# Altium PCB PCB1.PcbDoc
Units mm, origin at the board's own origin, x right, y up, seen from the top; angles counter-clockwise.
Board outline 26 x 26 mm, 2 copper layers (Top Layer, Bottom Layer); 10 components, 12 nets, 47 pads, 9 vias.
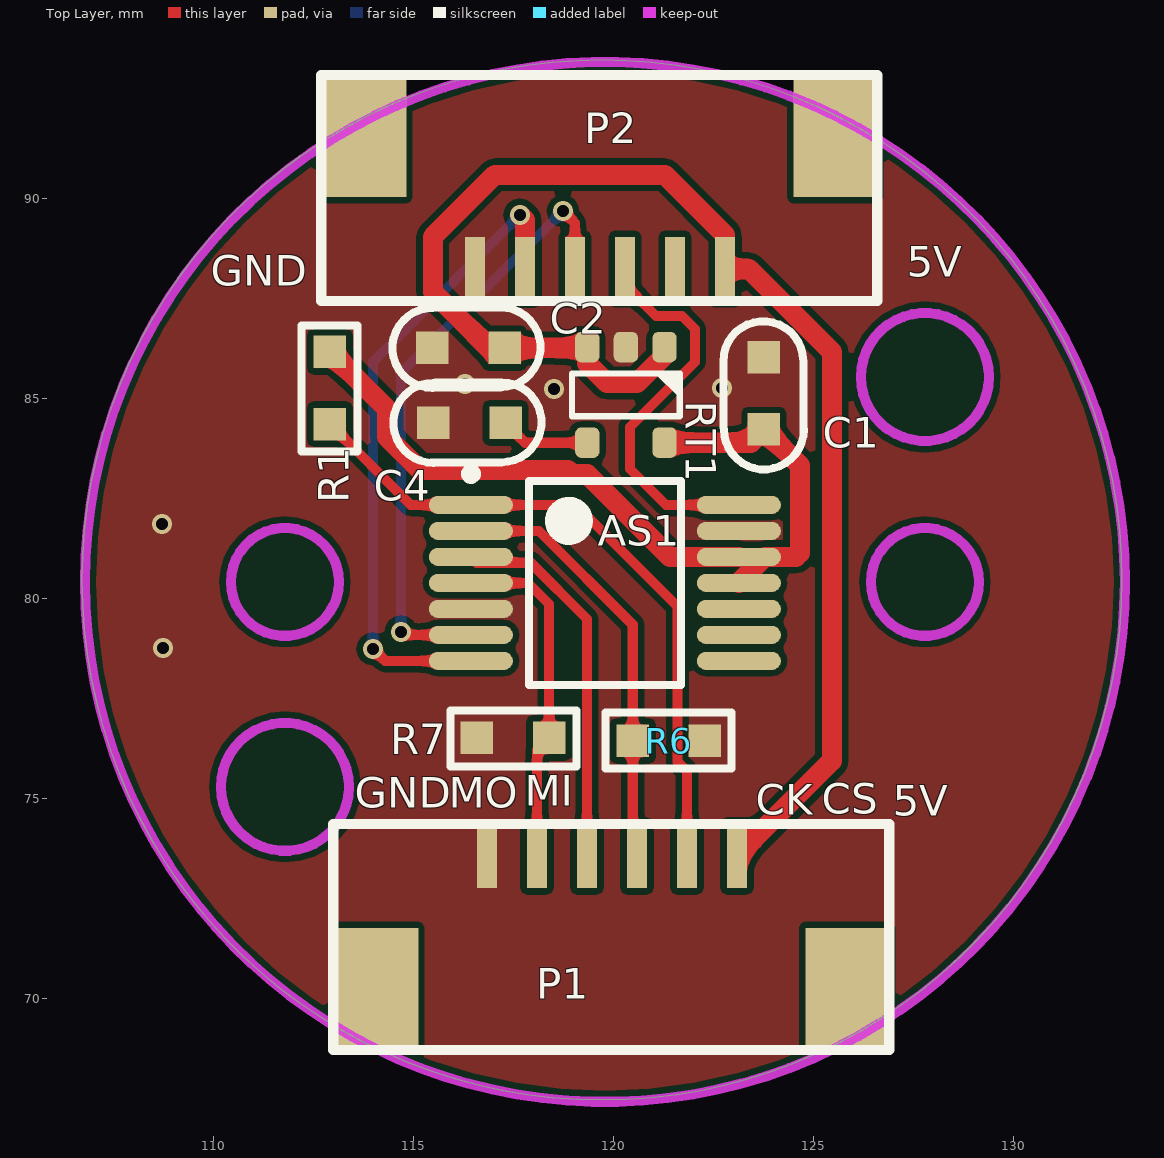
[diagram p0: Top Layer view]
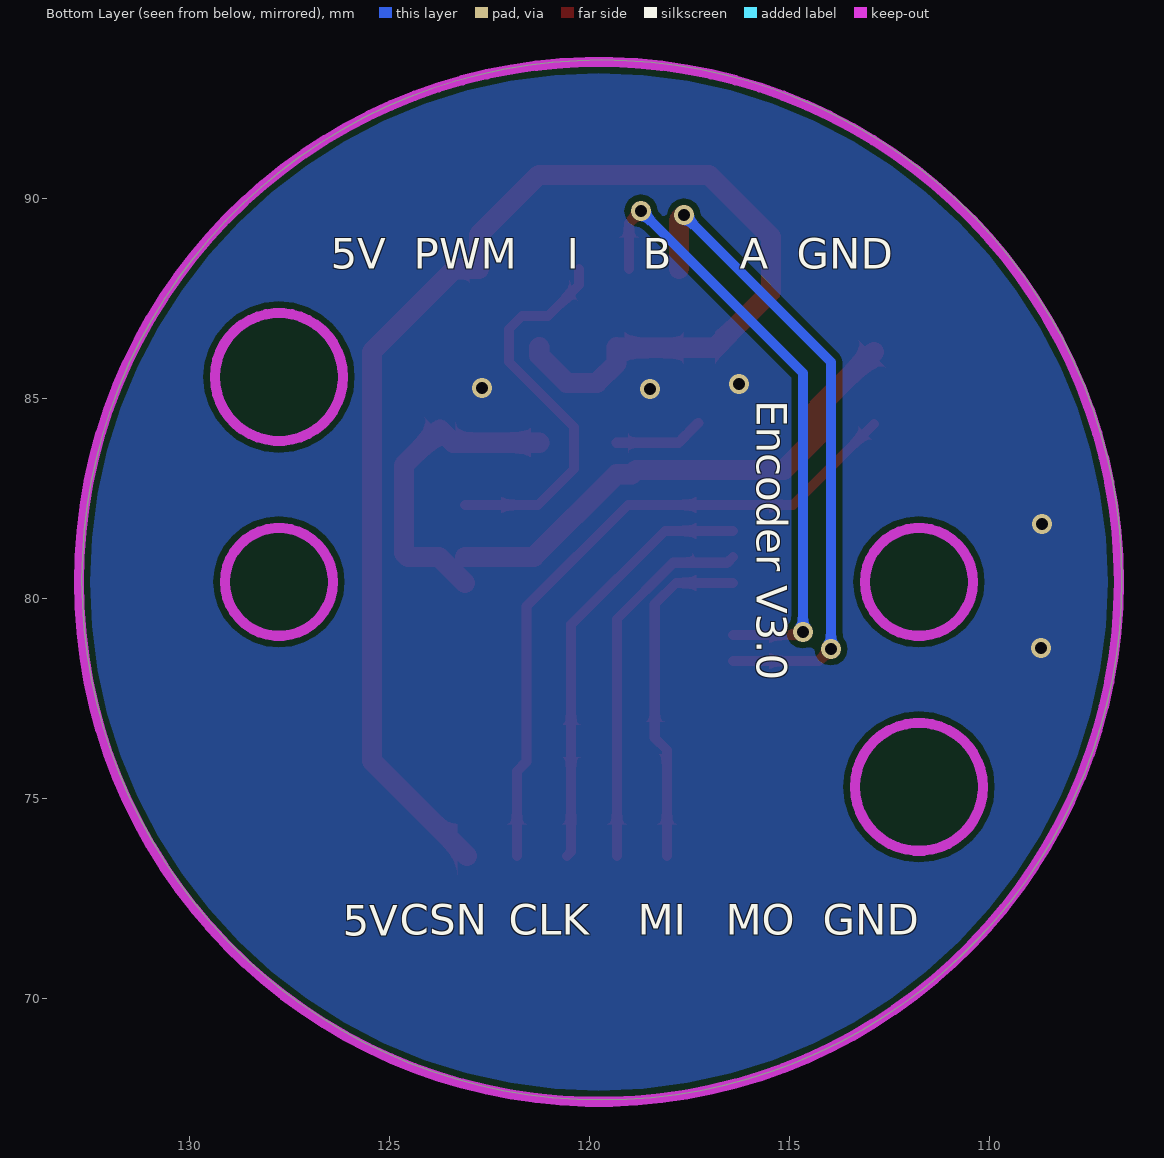
[diagram p1: Bottom Layer view, seen from below]
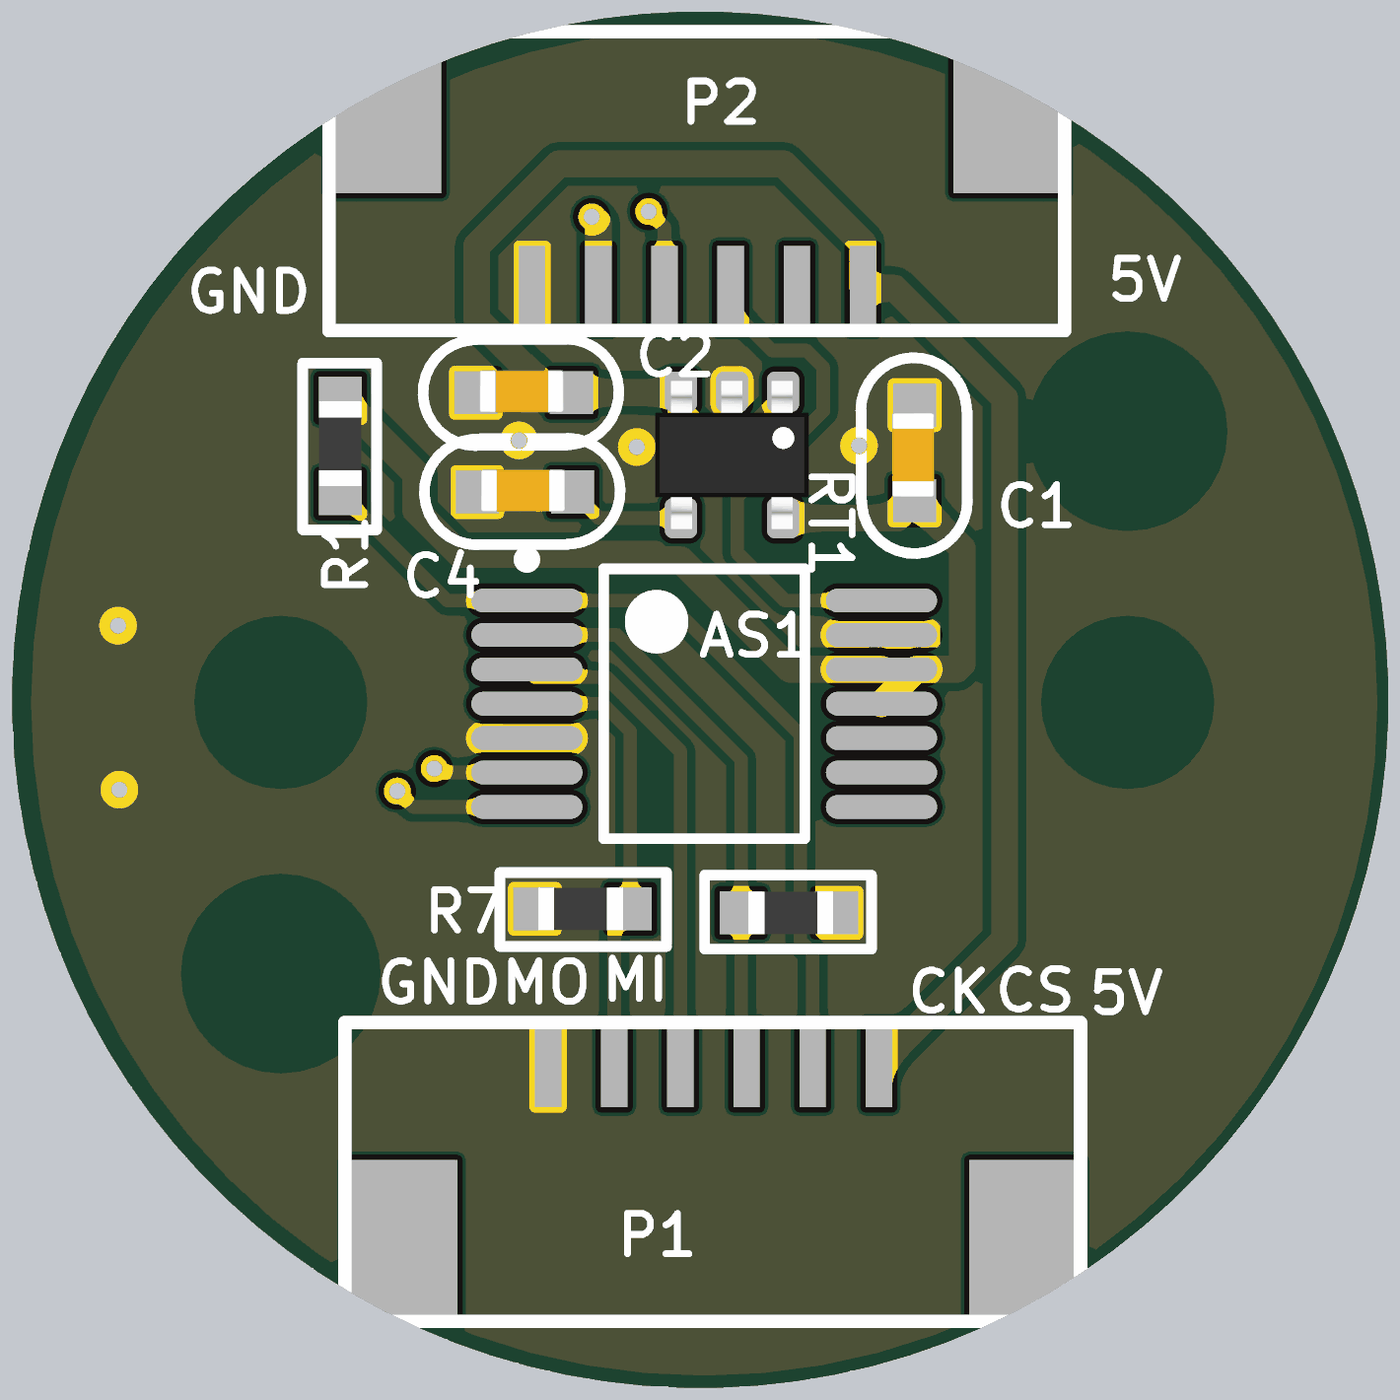
[diagram p2: 3D render of the assembled board from above, using the file's embedded part models]

## Layer stack, top to bottom
Top Solder: solder mask 0.0102, Solder Resist, Dk 3.5
Top Layer: signal copper 0.0356
Dielectric1: dielectric 0.32, FR-4, Dk 4.8
Bottom Layer: signal copper 0.0356
Bottom Solder: solder mask 0.0102, Solder Resist, Dk 3.5

## Board outline
106.7,80.475 ccw(c119.7,80.475) 119.7,67.475 ccw(c119.7,80.475) 132.7,80.475 ccw(c119.7,80.475) 119.7,93.475 ccw(c119.7,80.475)

## Design rules (kind name [scope] priority, off if disabled: settings)
Clearance [All] p1: gap=0.152 ignorepadtopadclearanceinfootprint=FALSE except(0: Arc-Hole Track-Hole SMDPad-Hole THPad-Hole Via-Hole Fill-Hole Poly-Hole Region-Hole Text-Hole)
PlaneConnect [All] p1: planeconnectstyle=Direct reliefexpansion=0.508 reliefentries=4 reliefconductorwidth=0.254 reliefairgap=0.254
PolygonConnect [All] p1: connectstyle=Direct reliefconductorwidth=0.254 reliefentries=4 polygonreliefangle="90 Angle" airgapwidth=0.254
RoutingPriority [All] p1: routingpriority=1
RoutingPriority RoutingPriority_CLK [InNetClass('New Class')] p2: routingpriority=0
RoutingTopology [All] p1: topology=Daisy_MidDriven
RoutingVias [All] p1: holewidth=0.305 width=0.508 viastyle="Through Hole" minholewidth=0.305 minwidth=0.508 maxholewidth=0.711 maxwidth=1.27
SolderMaskExpansion [All] p1: expansion=0.102
Width Width_1 [All] p1: maxlimit=1.27 minlimit=0.254 preferedwidth=0.254 minimp=50.000000 maximp=50.000000 favimp=50.000000
Width Width_5V [InNet('5V')] p2: maxlimit=2.032 minlimit=0.254 preferedwidth=0.508 minimp=50.000000 maximp=50.000000 favimp=50.000000
27 further rules are at their usual default settings.

## Components (designator, comment, footprint, x,y, rotation, side; value= is the part's Value field where it differs from the comment)
AS1 "AS5047P" AS5047P 119.775,80.4 r0 top
C1 "Cap_0603" CAP_0603 123.775,85.075 r90 top value=?F
C2 "Cap_0603" CAP_0603 116.3,86.25 r0 top value=?F
C4 "Cap_0603" CAP_0603 116.325,84.375 r0 top value=?F
P1 "HDR1x6_2.54" 1.25mm_1X6_SMT#1 119.285,73.702 r0 top
P2 "HDR1x6_2.54" 1.25mm_1X6_SMT#2 118.985,88.123 r0 top
R1 "Res_0603" RES_0603 110.817,85.311 r90 top value=4.7k
R6 "Res_0603" RES_0603 121.411,78.533 r0 top value=4.7K
R7 "Res_0603" RES_0603 117.439,74.442 r180 top value=4.7K
RT1 "RT9193" SOT23-5 120.3,85.1 r270 top

## Footprints (in the part's own frame and the unit in brackets; to place one, negate y for a bottom-side part, rotate by r counter-clockwise, add the part's x,y. Pads: shape width x height; smd on the part's side, far side on the other; paste and mask are expansions set on the pad)
1.25mm_1X6_SMT#1 [mm]
  rect 2.1x3 smd: 0(-5.225,-3.425) 0(6.55,-3.425)
  rect 0.5x1.6 smd: 1(-2.46,-0.127) 2(-1.21,-0.127) 3(0.04,-0.127) 4(1.29,-0.127) 5(2.54,-0.127) 6(3.79,-0.127)
  silkscreen extent -6.3,-4.97 7.6,0.67
1.25mm_1X6_SMT#2 [mm]
  rect 2.1x3 smd: 0(-5.225,3.425) 0(6.55,3.425)
  rect 0.5x1.6 smd: 1(-2.46,0.127) 2(-1.21,0.127) 3(0.04,0.127) 4(1.29,0.127) 5(2.54,0.127) 6(3.79,0.127)
  silkscreen extent -6.3,-0.67 7.6,4.97
AS5047P [mm] "SOP, 14-Leads, Body 5.00x5.29mm, Pitch 0.65mm, IPC Medium Density"
  oval 2.1x0.45 smd: 1(-3.35,1.95) 2(-3.35,1.3) 3(-3.35,0.65) 4(-3.35,0) 5(-3.35,-0.65) 6(-3.35,-1.3) 7(-3.35,-1.95) 8(3.35,-1.95) 9(3.35,-1.3) 10(3.35,-0.65) 11(3.35,0) 12(3.35,0.65) 13(3.35,1.3) 14(3.35,1.95)
  silkscreen extent -3.47,-2.55 1.9,2.85, body extent -2.7,-2.55 2.7,2.55, height 2.65
CAP_0603 [mil]
  rect 32x32 smd: 1(-33,1) 2(38,1)
  silkscreen extent -72,-38 73,41, body extent -30,-14 33,18, height 31
RES_0603 [mil]
  rect 32x32 smd: 1(-37,-82) 2(34,-82)
  silkscreen extent -64,-109 60,-54, body extent -31,-98 31,-66, height 18
SOT23-5 [mil]
  rrect50% 30x24 smd: 1(-47,38) 2(-47,0) 3(-47,-38) 4(47,-38) 5(47,38)
  silkscreen extent -21,-53 21,53, body extent -55,-57 55,57, height 57

## Part data
C1 C2 C4: "Capacitor"
P1 P2: library part HDR1x6_2.54T, "Header"
R1 R6 R7: "Resistor"
RT1: "Power"

## Via types
v1: diameter 0.508, hole 0.305, Top Layer to Bottom Layer, 9 vias

## Nets (pads, with @x,y where several pads share a name; then routed paths per layer and width w, separated by ;. In a path a pad name is that pad's centre, name@x,y a point inside that pad or via, vN(x,y) a via of type N, cw(c..) or ccw(c..) an arc to the next point about the centre after c; other vN are vias at no path point)
3V3: AS1.11 AS1.12 C1.1 R1.2 RT1.5 | length 20.7
  Top Layer w0.508: R1.2 114.325,84.75 114.325,84.05 115.15,83.225 118.845,83.225 118.951,83.119 119.331,83.119 121.4,81.05 AS1.12 ; RT1.5 123.419,83.906 C1.1 124.65,83.336 124.65,81.15 124.55,81.05 123.775,81.05 123.45,80.725 AS1.11
5V: C2.2 P1.6 P2.6 RT1.1 RT1.3 | length 35.4
  Top Layer w0.508: RT1.1 121.265,86.088 120.577,85.4 119.825,85.4 119.335,85.89 RT1.3 119.316,86.275 C2.2 116.875,86.275 115.475,87.675 115.475,89.05 117.025,90.6 121.275,90.6 122.775,89.1 P2.6 123.375,88.25 125.45,86.175 125.45,75.95 P1.6
A: AS1.7 P2.2 | length 16.3
  Top Layer w0.254: v1(113.975,78.75) 114.275,78.45 AS1.7
  Top Layer w0.508: v1(117.65,89.6) 117.775,89.475 P2.2
  Bottom Layer w0.254: v1(113.975,78.75) 113.975,85.925 v1(117.65,89.6)
B: AS1.6 P2.3 | length 15.6
  Top Layer w0.254: v1(114.675,79.175) 114.75,79.1 AS1.6 ; v1(118.725,89.7) 119.025,89.4 P2.3
  Bottom Layer w0.254: v1(114.675,79.175) 114.675,85.65 v1(118.725,89.7)
CLK: AS1.2 P1.4 R6.1 | length 10.8
  Top Layer w0.254: AS1.2 118.125,81.7 120.472,79.353 R6.1 120.472,73.678 P1.4
CSN: AS1.1 P1.5 R1.1 | length 16.9
  Top Layer w0.254: R1.1 114.922,82.35 AS1.1 119.05,82.35 121.589,79.811 121.589,75.928 121.825,75.692 P1.5
GND: AS1.5 AS1.13 C1.2 C2.1 C4.1 P1.1 P2.1 R6.2 R7.2 RT1.2
  other v1: 108.725,78.775 108.7,81.875 118.5,85.25 122.7,85.275 116.275,85.375
I: AS1.14 P2.4 | length 9.9
  Top Layer w0.254: P2.4 120.275,87.85 121.05,87.075 121.7,87.075 122.025,86.75 122.025,85.925 120.4,84.3 120.4,83.25 121.3,82.35 AS1.14
MISO: AS1.3 P1.3 | length 9.5
  Top Layer w0.254: AS1.3 116.571,80.904 117.92,80.904 119.325,79.5 P1.3
MOSI: AS1.4 P1.2 R7.1 | length 8.6
  Top Layer w0.254: AS1.4 117.85,80.4 118.378,79.872 R7.1 118.075,76.222 P1.2
NetC4_2: C4.2 RT1.4 | length 2.2
  Top Layer w0.254: C4.2 117.784,83.906 RT1.4
PWM: P2.5
pads on no net: AS1.8 AS1.9 AS1.10 P1.0 P2.0

## Polygon pours and split planes (outlines as drawn)
GND on Top Layer "gnd_TOP" (solid, remove dead copper, pour order 12): 105.225,94.975 105.575,94.625 136.8,94.625 136.8,67.675 136,66.875 135.4,67.475 105.7,67.475
GND on Bottom Layer "gnd_TOP" (solid, remove dead copper, pour order 14): 105.075,94.2 137.8,94.2 137.925,94.075 136.9,93.05 136.9,67.175 105.975,67.175 105.075,66.275

## Keep-outs
Keep-Out Layer:
  circle w0.254: c119.775,80.425 r13
  circle w0.254: c127.775,85.548 r1.6
  circle w0.254: c111.775,75.302 r1.6
  circle w0.254: c127.775,80.425 r1.35
  circle w0.254: c111.775,80.425 r1.35

## Silkscreen, mask and mechanical layers (free items; w line width, h text height)
Top Overlay:
  text "5V" at 127.325,88.05 h0.76
  text "GND" at 109.925,87.825 h0.76
  text "MI" at 117.775,74.825 h0.76
  text "GND" at 113.525,74.775 h0.76
  text "MO" at 115.875,74.775 h0.76
  text "CS" at 125.2,74.625 h0.76
  text "CK" at 123.55,74.6 h0.76
  text "5V" at 126.975,74.575 h0.76
Bottom Overlay:
  text "GND" at 114.825,88.25 h0.76
  text "A" at 116.25,88.25 h0.76
  text "B" at 118.675,88.25 h0.76
  text "I" at 120.575,88.25 h0.76
  text "PWM" at 124.4,88.25 h0.76
  text "5V" at 126.475,88.25 h0.76
  text "Encoder V3.0" at 115.824,84.963 h0.76 r90
  text "GND" at 114.175,71.6 h0.76
  text "MO" at 116.6,71.6 h0.76
  text "MI" at 118.8,71.6 h0.76
  text "CLK" at 122.025,71.6 h0.76
  text "CSN" at 124.75,71.6 h0.76
  text "5V" at 126.175,71.575 h0.76